# EAGLE board rapidshark-fuse-mk-1.1 (EAGLE 6.5.0)
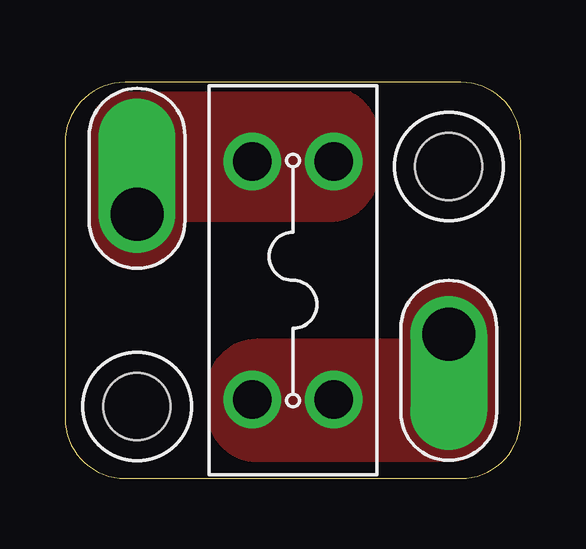
[diagram p0: board, top side]
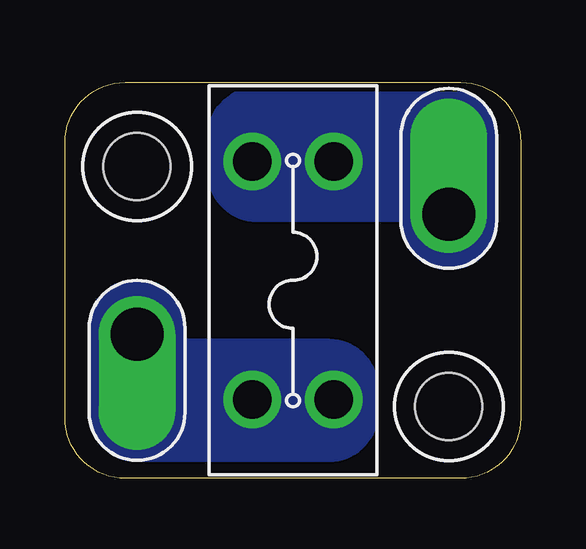
[diagram p1: board, bottom side, seen from below]

Size 19 x 16.5 mm. Coordinates in mm from the lower left corner, seen from the top.
Outline: 0,14 0,2.5 arc90 2.5,0 16.5,0 arc90 19,2.5 19,14 arc90 16.5,16.5 2.5,16.5 arc90 0,14
Copper layers (1*16): Top 0.0356mm / dielectric 1.5011mm / Bottom 0.0356mm
Design rules "LaenPCBOrder_2": minimum track width 6mil, minimum drill 13mil, track to track 6mil, track to pad 6mil, pad to pad 6mil, via to via 6mil, smd to smd 6mil, copper to edge 15mil, drill to drill 6mil, minimum pad ring 7mil, minimum via ring 7mil, stop-mask expansion 3mil, vias tented up to drill 20mil, thermal gap 10mil
Holes 2.8 mm at 3,3 16,13

## Footprints (pad centres in the part's own frame; a part is rotated, then mirrored left to right if it is on the bottom)
KEYSTONE-MINI-AUTO-FUSE-HOLDER = drill 1.6: P1@1 -4.96,1.7; P1@2 -4.96,-1.7; P2@1 4.96,1.7; P2@2 4.96,-1.7
1X01-12AWG-OFFSET = drill 2.2 pad 3 offset: 1 0,0

## Placement (x,y rotation side)
F1  15A  [KEYSTONE-MINI-AUTO-FUSE-HOLDER]  9.5,8.25 270 top
FRAME1  FRAME-LETTERNO_PACKAGE  [DUMMY]  0,0 0 top
J1  M0112AWG-OFFSET  [1X01-12AWG-OFFSET]  3,11 180 top
J2  M0112AWG-OFFSET  [1X01-12AWG-OFFSET]  16,6 0 bottom

## Library data of the parts
F1 J1 J2 = A_butts
FRAME1 = A_butts; DESIGNER: Nobody; VERSION: v01

## Nets
A: F1.P1@1 F1.P1@2 J1.1
B: F1.P2@1 F1.P2@2 J2.1

## Tracks (layer width: path | path; a pad name or v marks a point on that pad's centre or on a via)
A
  pour Bottom (no thermals): 5,10.75 arc-90 3,8.75 arc-90 1,10.75 1,14.25 arc-90 3,16.25 11,16.25 arc-90 13,14.25 13,12.75 arc-90 11,10.75
  pour Top (no thermals): 5,10.75 arc-90 3,8.75 arc-90 1,10.75 1,14.25 arc-90 3,16.25 11,16.25 arc-90 13,14.25 13,12.75 arc-90 11,10.75
B
  pour Bottom (no thermals): 16,0.75 8,0.75 arc-90 6,2.75 6,3.5 6,3.75 arc-90 8,5.75 14,5.75 14,6.25 arc-90 16,8.25 arc-90 18,6.25 18,2.75 arc-90
  pour Top (no thermals): 16,0.75 8,0.75 arc-90 6,2.75 6,3.75 arc-90 8,5.75 14,5.75 14,6.25 arc-90 16,8.25 arc-90 18,6.25 18,2.75 arc-90